# EAGLE board BrewTrollerWChipOnboard (EAGLE 5.00)
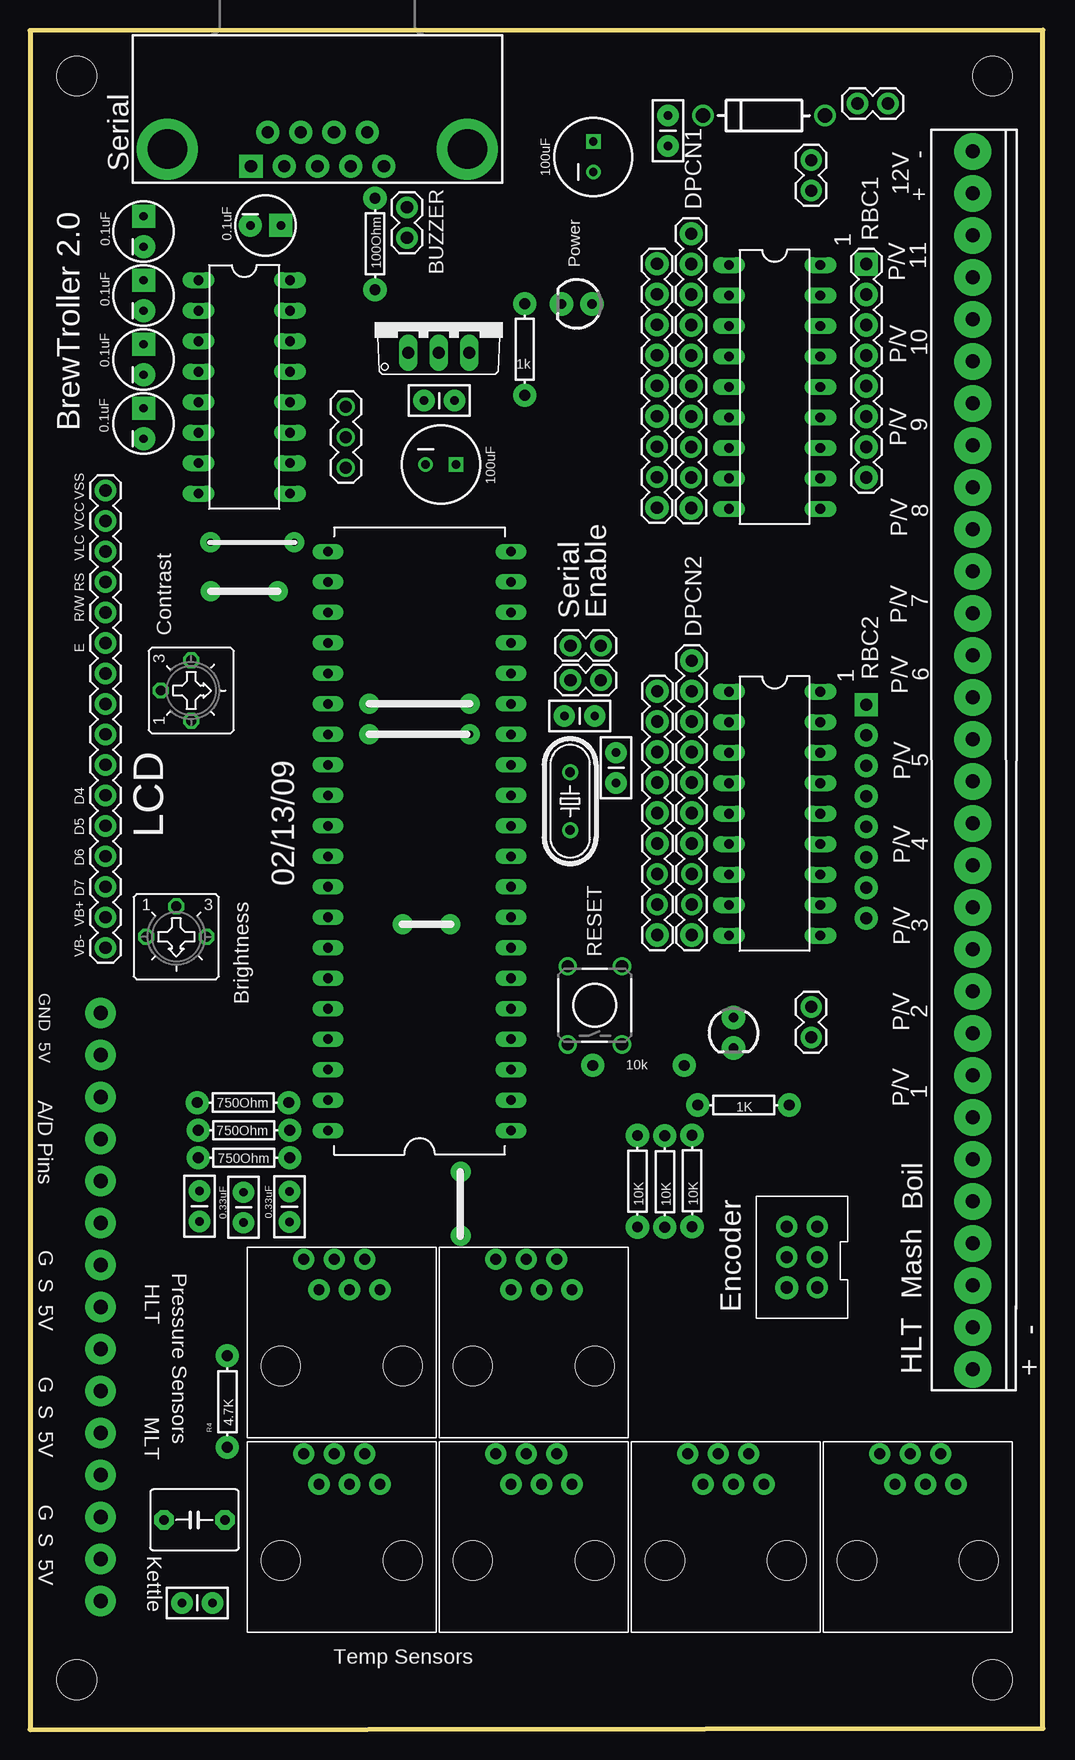
[diagram p0: board, top side]
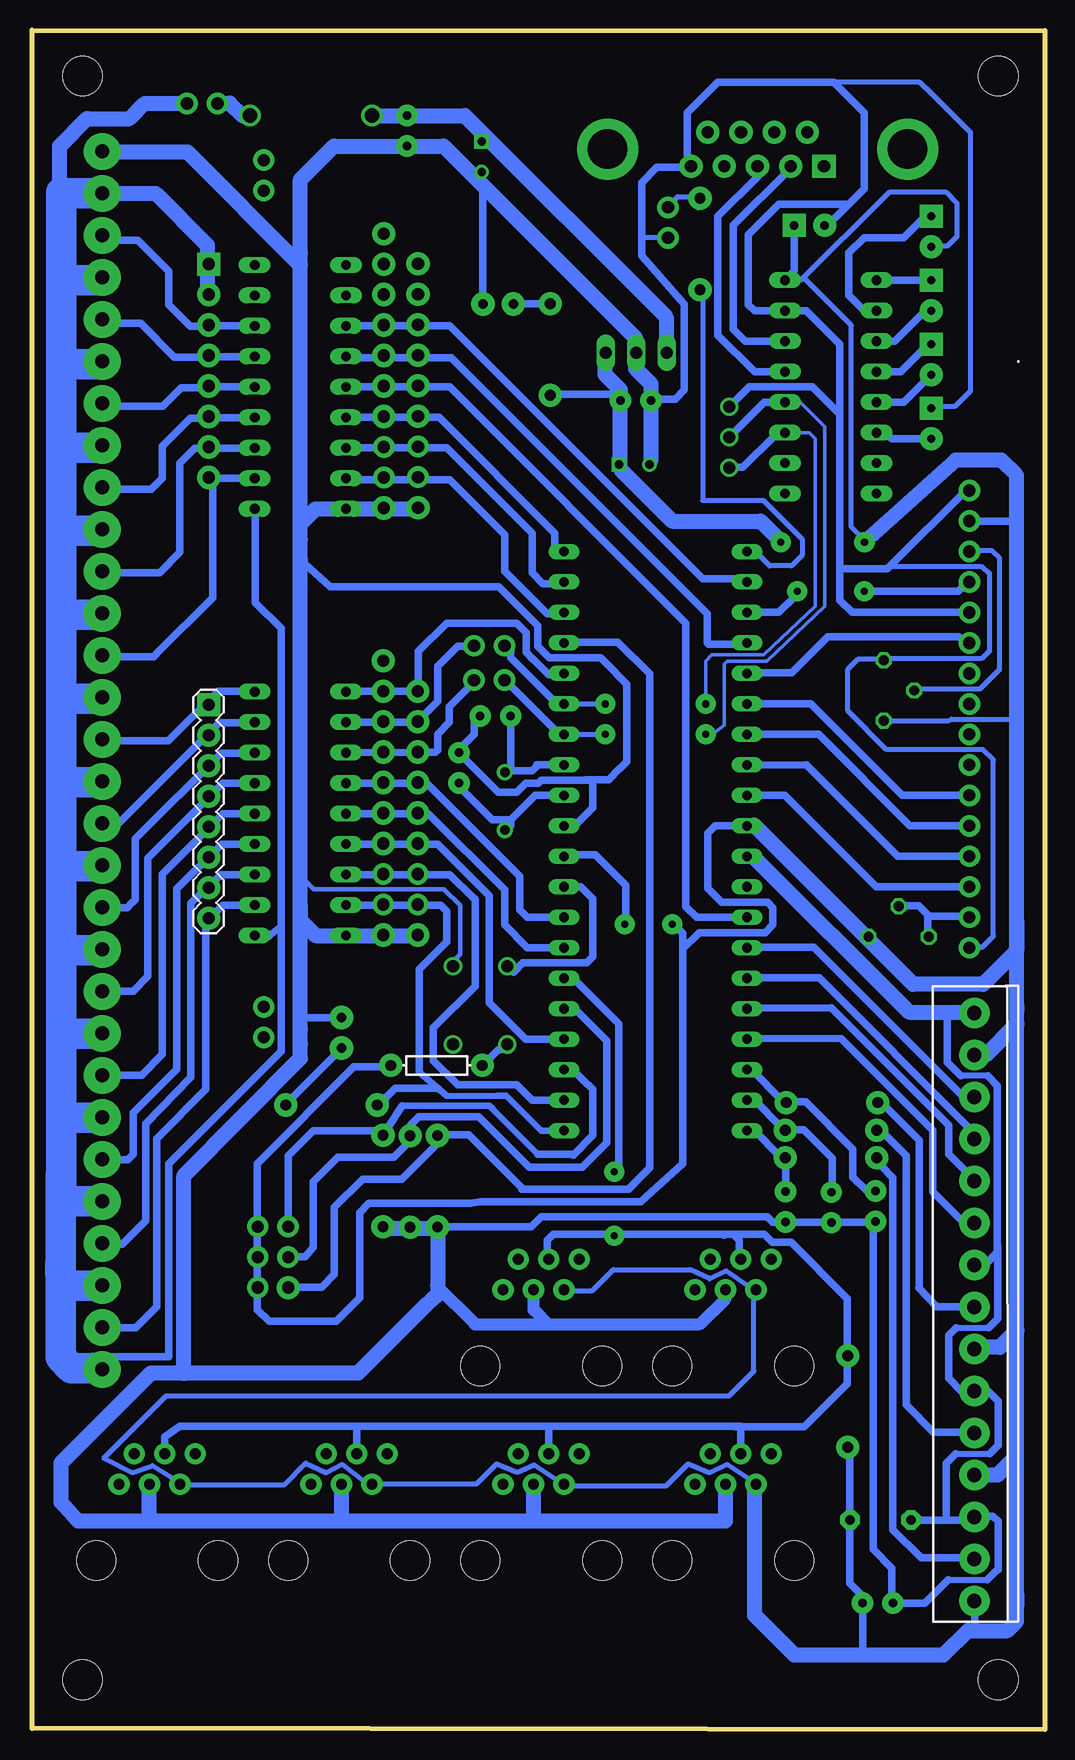
[diagram p1: board, bottom side, seen from below]

Size 84.4 x 141.63 mm. Coordinates in mm from the lower left corner, seen from the top.
Outline: 84.4,0.1 84.4,141.63 0,141.58 0,0 84.4,0.1
Copper layers (1*16): Top 0.035mm / dielectric 1.5mm / Bottom 0.035mm
Design rules "default *": minimum track width 10mil, minimum drill 24mil, track to track 8mil, track to pad 8mil, pad to pad 8mil, via to via 8mil, smd to smd 8mil, copper to edge 40mil, drill to drill 8mil, minimum pad ring 10mil, minimum via ring 8mil, stop-mask expansion 4mil, vias tented up to drill 0mil, thermal gap 10mil

## Footprints (pad centres in the part's own frame; a part is rotated, then mirrored left to right if it is on the bottom)
1X02 = drill 1.016 pad 1.778 round: 1 0,0; 2 2.54,0
LED3MM = drill 0.813 pad 1.93 round: A -1.27,0; K 1.27,0
HC49/S = drill 0.813 round: 1 -2.413,0; 2 2.413,0
DIL18 = drill 0.813 long: 1 -10.16,-3.81; 2 -7.62,-3.81; 3 -5.08,-3.81; 4 -2.54,-3.81; 5 0,-3.81; 6 2.54,-3.81; 7 5.08,-3.81; 8 7.62,-3.81; 9 10.16,-3.81; 10 10.16,3.81; 11 7.62,3.81; 12 5.08,3.81; 13 2.54,3.81; 14 0,3.81; 15 -2.54,3.81; 16 -5.08,3.81; 17 -7.62,3.81; 18 -10.16,3.81
DB9 = drill 1.016 pad 1.93 square: 1 -5.54,-1.42 | drill 1.016 pad 1.93 round: 2 -2.77,-1.42; 3 0,-1.42; 4 2.77,-1.42; 5 5.54,-1.42; 6 -4.15,1.42; 7 -1.38,1.42; 8 1.38,1.42; 9 4.15,1.42 | drill 3.302 pad 5.08 round: G1 -12.5,0; G2 12.5,0
SCREWTERMINAL3.5MM15P = drill 1.2 pad 2.54 round: 1 0.051,0.102; 2 3.551,0.102; 3 7.051,0.102; 4 10.551,0.102; 5 14.051,0.102; 6 17.551,0.102; 7 21.051,0.102; 8 24.551,0.102; 9 28.051,0.102; 10 31.551,0.102; 11 35.051,0.102; 12 38.551,0.102; 13 42.051,0.102; 14 45.551,0.102; 15 49.051,0.102
CAP-PTH-SMALL2 = drill 0.7 pad 1.778 round: 1 0,0; 2 2.54,0
2X3SHROUDEDHEADER = drill 1.02 pad 1.778 round: P$1 0,2.54; P$3 2.54,5.08; P$4 2.54,2.54; P$5 5.08,5.08; P$6 5.08,2.54 | drill 1.02 pad 1.93 round: P$2 0,5.08
C5B5 = drill 0.813 pad 1.6 octagon: 1 -2.54,0; 2 2.54,0
DIL40 = drill 0.8 long: 1 -24.13,-7.62; 2 -21.59,-7.62; 3 -19.05,-7.62; 4 -16.51,-7.62; 5 -13.97,-7.62; 6 -11.43,-7.62; 7 -8.89,-7.62; 8 -6.35,-7.62; 9 -3.81,-7.62; 10 -1.27,-7.62; 11 1.27,-7.62; 12 3.81,-7.62; 13 6.35,-7.62; 14 8.89,-7.62; 15 11.43,-7.62; 16 13.97,-7.62; 17 16.51,-7.62; 18 19.05,-7.62; 19 21.59,-7.62; 20 24.13,-7.62; 21 24.13,7.62; 22 21.59,7.62; 23 19.05,7.62; 24 16.51,7.62; 25 13.97,7.62; 26 11.43,7.62; 27 8.89,7.62; 28 6.35,7.62; 29 3.81,7.62; 30 1.27,7.62; 31 -1.27,7.62; 32 -3.81,7.62; 33 -6.35,7.62; 34 -8.89,7.62; 35 -11.43,7.62; 36 -13.97,7.62; 37 -16.51,7.62; 38 -19.05,7.62; 39 -21.59,7.62; 40 -24.13,7.62
CPOL-RADIAL-100UF-25V = drill 0.7 square: 1 1.27,0 | drill 0.7 round: 2 -1.27,0
TO220V = drill 1.016 long: 1 -2.54,-2.54; 2 0,-2.54; 3 2.54,-2.54
AXIAL-0.3 = drill 0.9 pad 1.93 round: P$1 -3.81,0; P$2 3.81,0
DIL16 = drill 0.813 long: 1 -8.89,-3.81; 2 -6.35,-3.81; 3 -3.81,-3.81; 4 -1.27,-3.81; 5 1.27,-3.81; 6 3.81,-3.81; 7 6.35,-3.81; 8 8.89,-3.81; 9 8.89,3.81; 10 6.35,3.81; 11 3.81,3.81; 12 1.27,3.81; 13 -1.27,3.81; 14 -3.81,3.81; 15 -6.35,3.81; 16 -8.89,3.81
CPOL-RADIAL-10UF-25V = drill 0.7 pad 1.93 square: 1 1.27,0 | drill 0.7 pad 1.93 round: 2 -1.27,0
RJ11VERTICAL = drill 0.9 pad 1.778 round: PIN1 1.905,8.89; PIN2 3.175,6.35; PIN3 4.445,8.89; PIN4 5.715,6.35; PIN5 6.985,8.89; PIN6 8.255,6.35 | hole 3.251: 0,0; 10.16,0
1X09 = drill 1.016 pad 1.93 round: 1 0,0; 4 7.62,0; 5 10.16,0; 6 12.7,0; 7 15.24,0; 8 17.78,0; 9 20.32,0 | drill 1.016 pad 1.778 round: 2 2.54,0; 3 5.08,0
1X08 = drill 1.016 pad 1.93 square: 1 0,0 | drill 1.016 pad 1.93 round: 2 2.54,0; 3 5.08,0; 4 7.62,0; 5 10.16,0; 6 12.7,0; 7 15.24,0; 8 17.78,0
1X16 = drill 1.016 pad 1.778 round: 1 0,0; 2 2.54,0; 3 5.08,0; 4 7.62,0; 5 10.16,0; 6 12.7,0; 7 15.24,0; 8 17.78,0; 9 20.32,0; 10 22.86,0; 11 25.4,0; 12 27.94,0; 13 30.48,0; 14 33.02,0; 15 35.56,0; 16 38.1,0
STAND-OFF = hole 3.302: 0,0
1X10 = drill 1.016 pad 1.93 round: 1 0,0; 4 7.62,0; 5 10.16,0; 6 12.7,0; 7 15.24,0; 8 17.78,0; 9 20.32,0; 10 22.86,0 | drill 1.016 pad 1.778 round: 2 2.54,0; 3 5.08,0
SCREWTERMINAL3.5MM30P = drill 1.2 pad 3.048 round: 1 0,0; 2 3.5,0; 3 7,0; 4 10.5,0; 5 14,0; 6 17.5,0; 7 21,0; 8 24.5,0; 9 28,0; 10 31.5,0; 11 35,0; 12 38.5,0; 13 42,0; 14 45.5,0; 15 49,0; 16 52.5,0; 17 56,0; 18 59.5,0; 19 63,0; 20 66.5,0; 21 66.5,0; 22 70,0; 23 73.5,0; 24 77,0; 25 80.5,0; 26 84,0; 27 87.5,0; 28 91,0; 29 94.5,0; 30 98,0; 31 101.5,0
CT6 = drill 0.813 octagon: A 2.515,0; E -2.515,0; S 0,-2.54
DIODE-1N4001 = drill 1.2 round: A -5.08,0; C 5.08,0
1X03 = drill 1.016 round: 1 0,0; 2 2.54,0; 3 5.08,0
TACTILE-PTH = drill 1.016 round: 1 -3.251,2.261; 2 3.251,2.261; 3 -3.251,-2.261; 4 3.251,-2.261

## Placement (x,y rotation side)
BUZZER  [1X02]  31.42,126.85 270 top
E$1  Debug  [LED3MM]  58.62,58.06 270 top
E$2  16Mhz  [HC49/S]  45.01,77.37 270 top
E$3  ULN2803  [DIL18]  62.05,76.33 270 top
E$4  [DB9]  23.95,131.7 0 top
E$5  [SCREWTERMINAL3.5MM15P]  5.79,10.67 90 bottom
E$6  ULN2803  [DIL18]  62.05,111.89 270 top
E$7  0.33uF  [CAP-PTH-SMALL2]  21.62,44.83 270 top
E$8  [2X3SHROUDEDHEADER]  68.15,36.83 90 top
E$9  .015uF  [C5B5]  13.7,17.47 180 top
E$10  ATMEGA644p  [DIL40]  32.46,74.04 90 top
E$11  100uF  [CPOL-RADIAL-100UF-25V]  46.94,131.06 90 top
E$12  100uF  [CPOL-RADIAL-100UF-25V]  34.24,105.41 0 top
E$13  100nF  [CAP-PTH-SMALL2]  53.16,134.49 270 top
E$14  100nF  [CAP-PTH-SMALL2]  35.38,110.74 180 top
E$15  22pF  [CAP-PTH-SMALL2]  47.07,84.46 180 top
E$16  22pF  [CAP-PTH-SMALL2]  48.84,78.87 90 top
E$17  7805  [TO220V]  34.06,117.27 0 top
E$18  [LED3MM]  45.57,118.8 180 top
E$19  1k  [AXIAL-0.3]  41.22,115.01 90 top
E$20  MAX202  [DIL16]  17.86,111.89 270 top
E$21  0.1uF  [CPOL-RADIAL-10UF-25V]  9.47,119.51 90 top
E$22  0.1uF  [CPOL-RADIAL-10UF-25V]  9.47,114.17 90 top
E$23  0.1uF  [CPOL-RADIAL-10UF-25V]  9.47,124.84 90 top
E$24  [RJ11VERTICAL]  68.91,14.1 0 top
E$25  [RJ11VERTICAL]  52.91,14.1 0 top
E$26  [RJ11VERTICAL]  36.91,14.1 0 top
E$27  [RJ11VERTICAL]  20.9,14.1 0 top
E$28  [RJ11VERTICAL]  20.9,30.3 0 top
E$29  [RJ11VERTICAL]  36.91,30.3 0 top
E$30  0.1uF  [CPOL-RADIAL-10UF-25V]  19.63,125.35 0 top
E$31  0.1uF  [CPOL-RADIAL-10UF-25V]  9.47,108.84 90 top
E$32  [1X09]  52.27,66.22 90 top
E$33  [1X02]  47.57,90.32 180 top
E$34  [1X08]  69.7,85.39 270 bottom
E$35  [1X08]  69.7,122.12 270 top
E$36  100Ohm  [AXIAL-0.3]  28.75,123.8 90 top
E$37  [1X09]  52.25,101.83 90 top
E$38  [1X16]  6.3,103.25 270 top
E$39  [1X02]  65.1,57.68 90 top
E$40  [STAND-OFF]  80.21,4.14 90 top
E$41  [STAND-OFF]  3.89,4.14 90 top
E$42  [STAND-OFF]  3.89,137.79 90 top
E$43  [STAND-OFF]  80.21,137.79 90 top
E$44  [1X10]  55.14,66.22 90 top
E$45  [1X10]  55.09,101.8 90 top
E$46  [1X02]  47.57,87.45 180 top
E$47  [1X02]  65.1,128.24 90 top
E$48  0.33uF  [CAP-PTH-SMALL2]  17.81,44.78 270 top
E$49  0.33uF  [CAP-PTH-SMALL2]  14.12,44.88 270 top
E$50  10k  [AXIAL-0.3]  50.7,55.35 180 bottom
E$51  0.01uF  [CAP-PTH-SMALL2]  12.67,10.56 0 top
E$52  [SCREWTERMINAL3.5MM30P]  78.56,30.02 90 top
E$53  100Ohm  [CT6]  12.19,66.07 180 top
E$54  10K  [CT6]  13.44,86.59 270 top
E$55  1K  [AXIAL-0.3]  59.46,52.04 180 top
E$56  750Ohm  [AXIAL-0.3]  17.75,52.25 180 top
E$57  750Ohm  [AXIAL-0.3]  17.83,49.94 0 top
E$58  750Ohm  [AXIAL-0.3]  17.83,47.65 180 top
E$59  Switch  [1X02]  71.5,135.51 180 top
E$60  [DIODE-1N4001]  61.16,134.49 180 top
E$61  TTLProg  [1X03]  26.31,105.16 90 top
R1  10K  [AXIAL-0.3]  50.62,45.69 90 top
R2  10K  [AXIAL-0.3]  52.91,45.67 90 top
R3  10K  [AXIAL-0.3]  55.17,45.72 90 top
R4  4.7K  [AXIAL-0.3]  16.45,27.33 90 top
RESET  Reset  [TACTILE-PTH]  47.07,60.35 90 top

## Library data of the parts
BUZZER E$1 E$3 E$4 E$6 E$7 E$10-E$23 E$30-E$51 E$55-E$61 R1-R4 RESET = SparkFun
E$2 = crystal
E$5 E$8 E$24-E$29 E$52 = Personal
E$9 = capacitor-wima
E$53 E$54 = pot

## Nets
S$22: E$3.5
S$65: E$10.13
S$67: E$26.PIN4
S$77: E$3.9 E$6.9
S$79: E$24.PIN4 E$25.PIN4 E$27.PIN4
S$80: E$25.PIN3
S$105: E$6.11
S$118: E$24.PIN3 E$27.PIN3

## Tracks (layer width: path | path; a pad name or v marks a point on that pad's centre or on a via)
S$1
  Bottom 1.27: 55.75,134.49 48.34,134.49 31.57,117.73 31.57,115.44
S$2
  Bottom 0.61: 62.81,52.6 62.79,52.6 59.08,56.31
S$3
  Bottom 0.61: 42.67,89.21 43.23,89.76 43.23,91.39 44.02,92.18 48.39,92.18
S$4
  Bottom 0.61: 40.54,87.91 41.35,87.91 42.72,89.28
S$5
  Bottom 0.61: 44.5,89.89 44.5,89.33 40.67,85.5
S$6
  Bottom 0.61: 44.53,79.86 44.53,83.95
S$7
  Bottom 0.61: 47.57,84.2 47.57,82.93 48.59,81.92 48.59,81.15 45.54,78.11 44.02,78.11 43.26,78.87 42.24,78.87 41.99,79.12 37.92,79.12 37.67,78.87 37.67,76.84 39.19,75.31
S$8
  Bottom 0.381: 49.15,64.21 48.74,64.62 48.74,68.68 50.09,70.03 60.93,70.03 61.72,70.82 61.72,71.12
S$9  (via drill 0.6 pad 1.68)
  other vias: 36.65,82.93
S$10
  Bottom 0.61: 57.68,71.25 49.61,71.25 47.57,69.22
S$11
  Bottom 0.61: 51.38,73.79 50.62,73.79 46.3,69.47 46.3,60.58 43.26,57.53 40.36,57.53
S$12
  Bottom 0.61: 39.19,70.23 38.68,70.23 37.67,69.22 37.67,64.39 38.18,63.88 43.51,63.88 44.27,63.12
S$13
  Bottom 0.559: 52.15,54.76 49.84,52.81
  Bottom 0.61: 58.37,68.71 50.37,68.71 49.86,68.2 49.86,65.66 52.15,63.37 52.15,54.76
S$14
  Bottom 2.54: 81.99,49.02 81.99,128.09
S$15
  Bottom 0.61: 23.95,129.41 27.25,126.11 27.25,116.21 24.21,113.16 22.28,113.16
S$16
  Bottom 0.61: 39.4,54.99 37.67,53.34 37.67,49.53 39.32,47.88
S$17
  Bottom 0.61: 52.22,101.8 52.27,101.75
S$18
  Bottom 0.61: 57.94,73.79 51.51,73.79
S$19
  Bottom 0.61: 59.13,59.31 62.03,59.31 62.1,59.39
S$20
  Bottom 0.61: 39.32,60.2 36.53,57.4 36.53,48.9 38.56,46.86
S$21
  Bottom 0.61: 34.24,45.47 34.67,45.03 43.49,45.03 | 43.49,45.03 43.61,45.03 | 48.08,49.56 48.01,49.56 43.49,45.03
S$22
  Bottom 0.61: 40.72,65.15 43.13,65.15 45.03,67.06 45.03,69.98 51.38,76.33 E$3.5
S$23
  Bottom 0.61: 39.32,62.61 35.51,58.8 35.51,46.61
S$24
  Bottom 0.61: 21.62,120.83 20.88,121.56 20.88,125.04
S$25
  Bottom 0.61: 14.15,120.78 9.98,120.78
S$26
  Bottom 0.635: 65.8,101.79 65.8,93.92 63.64,91.76 63.64,66.93 64.66,66.17
S$27
  Bottom 2.54: 81.99,45.53 81.99,48.96
S$28
  Bottom 2.54: 81.17,50.99 78.56,50.99
S$29
  Bottom 2.54: 81.23,57.98 78.56,57.98
S$30
  Bottom 2.54: 81.29,64.96 78.56,64.96
S$31
  Bottom 2.54: 81.23,78.93 78.56,78.93
S$32
  Bottom 2.54: 81.61,85.92 78.56,85.92
S$33
  Bottom 2.54: 81.23,92.9 78.56,92.9
S$34
  Bottom 2.54: 81.29,99.89 78.56,99.89
S$35
  Bottom 2.54: 81.36,106.81 78.56,106.81
S$36
  Bottom 2.54: 81.23,113.79 78.56,113.79
S$37
  Bottom 2.54: 81.04,120.78 78.56,120.78
S$38  (via drill 0.6 pad 1.68)
  other vias: 35.89,46.48
S$39
  Bottom 2.54: 81.55,71.95 78.56,71.95
S$40
  Bottom 0.61: 63.63,67.39 63.63,56.52 73,47.14 73,31.06 79.38,31.06 79.4,31.09
S$41
  Bottom 0.61: 77.85,33.48 75.77,33.48 74.02,35.23 74.02,49.25 69.93,53.34 69.93,67.31 68.53,68.71 66.8,68.71 66.75,68.76
S$42
  Bottom 0.61: 77.88,40.46 76.89,40.46 74.96,42.39 74.96,50.47 71.2,54.36 71.2,68.86 68.68,71.25 66.8,71.25
S$43
  Bottom 0.61: 77.83,47.5 76.45,47.5 76,47.96 76,51.38 72.34,55.04 72.34,70.05 68.61,73.79 66.78,73.79 66.75,73.81
S$44
  Bottom 0.61: 66.78,76.28 66.7,76.35
S$45
  Bottom 0.61: 77.75,54.53 75.29,54.53 73.56,56.26 73.56,71.27 68.5,76.33 66.83,76.33 66.8,76.3
S$46
  Bottom 0.61: 77.83,61.52 76,61.52 74.75,62.76 74.75,72.62 68.55,78.82
S$47
  Bottom 0.61: 68.5,78.84 66.73,78.84
S$48
  Bottom 0.61: 66.8,104.27 66.83,104.29
S$49
  Bottom 0.61: 66.85,111.86 66.83,111.89
S$50
  Bottom 0.61: 78.54,110.29 73.53,110.29 71.98,111.84 69.27,111.84
S$51
  Bottom 0.61: 66.73,116.92 66.83,117.02
S$52
  Bottom 0.406: 6.3,103.28 6.35,103.23
S$53  (via drill 0.6 pad 1.68)
  other vias: 35.89,41.15
S$54
  Bottom 0.61: 40.84,67.69 43.13,67.69 43.76,68.33 43.76,71.12 51.51,78.87 58.5,78.87
S$55
  Bottom 0.61: 9.98,118.24 12.52,115.7 13.64,115.7
S$56
  Bottom 0.61: 9.98,115.19 12.01,113.16 13.61,113.16
S$57
  Bottom 0.61: 77.78,68.5 76.48,68.5 76.05,68.94 76.02,68.94 75.79,69.16 75.79,74.22 68.66,81.36 66.5,81.36
S$58
  Bottom 0.61: 40.21,77.85 42.49,77.85 44.53,75.82 | 44.53,75.82 44.53,75.31 | 44.53,75.82 46.05,75.82 48.59,78.36
S$59
  Bottom 0.61: 9.73,112.65 11.76,110.62 13.54,110.62
S$60
  Bottom 0.61: 13.28,108.08 12.78,107.57 9.73,107.57
S$61
  Bottom 0.61: 9.98,126.11 11.76,124.33 15.06,124.33 16.33,123.06 16.33,119.51 15.09,118.26 | 15.06,118.24 15.09,118.26 | 15.09,118.26 14.1,118.26
S$62
  Bottom 0.61: 21.41,129.92 25.98,125.35 25.98,116.71 24.97,115.7 22.43,115.7
S$63
  Bottom 1.27: 6.81,59.79 11.33,59.79 24.33,72.8
S$64
  Bottom 0.61: 39.57,90.63 35.59,90.63 32.94,87.99 32.94,46.81 34.7,45.06
S$65
  Bottom 0.61: 42.24,80.39 42.37,80.39 | 42.24,80.39 E$10.13 | 44.4,79.88 42.75,79.88 42.24,80.39
S$66
  Bottom 1.27: 36.65,114.17 36.65,112.9 35.38,111.63 35.38,105.03 31.06,100.71 23.7,100.71 22.02,99.03
S$67
  Bottom 1.27: 42.62,17.65 E$26.PIN4
S$68
  Bottom 0.61: 44.5,86.97 40.46,82.93
S$69
  Bottom 0.61: 40.97,92.96 41.48,92.96 45.03,96.52 45.03,99.57 49.61,104.14 58.24,104.14 58.37,104.27 58.37,104.14
S$70
  Bottom 0.61: 40.84,95.5 41.86,95.5 42.75,96.39 42.75,99.7 49.86,106.81 58.37,106.81
S$71
  Bottom 0.61: 40.84,98.04 40.84,99.7 50.5,109.35 57.99,109.35
S$72
  Bottom 0.61: 39.27,75.29 40.01,75.29
S$73
  Bottom 0.61: 25.73,67.69 29.03,67.69 29.92,68.58 29.92,92.2 49.61,111.89 58.37,111.89
S$74
  Bottom 0.61: 25.6,90.42 28.02,90.42 28.14,90.55 28.14,92.96 49.48,114.3 57.86,114.3
S$75  (via drill 0.6 pad 1.68)
  other vias: 36.65,85.47
S$76
  Bottom 0.61: 22.43,118.24 24.21,118.24 24.71,118.75 24.71,124.59 22.17,127.13 16.33,127.13 | 29.54,130.94 29.79,131.19 29.79,134.75 27.25,137.29 17.6,137.29 15.06,134.75 15.06,128.4 16.33,127.13 | 16.33,127.13 18.11,125.35
S$77
  Bottom 0.406: 62.05,99.19 62.05,100.46
  Bottom 0.61: 30.3,130.18 32.33,130.18 33.6,128.91 33.6,126.37 | 33.6,126.37 33.6,126.62 | 38.25,79.15 36.37,79.15 35.46,80.06 35.43,80.06 34.85,80.65 34.85,87.12 36.65,88.93 36.65,88.95 37.01,89.31 41.3,89.31 42.27,90.27 42.27,92 45.52,95.25 59.56,95.25 62.05,97.49 | 33.6,126.37 33.6,122.81 30.05,118.8 30.05,111.63 30.81,110.87 32.84,110.87
  Bottom 1.27: 32.84,105.79 32.84,110.87 32.84,112.14 34.11,113.41 34.11,115.95 50.11,131.95 59.26,131.95 62.05,129.16 62.05,122.05 | 52.27,101.85 52.27,101.73 E$6.9 60.78,101.73 62.05,100.46 | 62.05,122.05 62.05,123.06 | 58.62,66.17 E$3.9 | 58.62,66.17 52.27,66.17 | 58.62,66.17 60.78,66.17 62.05,67.44 62.05,68.58 | 62.05,122.05 62.05,99.19 62.05,97.49 62.05,68.58 | 62.05,57.15 62.05,68.58 | 62.05,122.05 71.45,131.45 77.55,131.45
S$78  (via drill 0.6 pad 1.68)
  other vias: 28.27,82.93
S$79
  Bottom 1.27: E$27.PIN4 26.62,17.4 58.62,17.4 | 58.62,17.4 E$25.PIN4 | E$24.PIN4 74.63,17.78 74.24,17.4 58.62,17.4
S$80
  Bottom 0.635: E$25.PIN3 57.35,25.15
S$81  (via drill 0.6 pad 1.68)
  other vias: 28.27,85.47
S$82
  Bottom 0.406: 39.45,82.93 37.16,82.93
S$83
  Bottom 0.61: 25.6,95.89 28.52,95.89 49.61,116.97 58.62,116.97
S$84
  Bottom 0.305: 28.27,85.47 28.27,89.03 27.76,89.56 23.44,89.56 19.13,93.62 19.13,107.57 19.63,108.08 20.9,108.08
S$85
  Bottom 0.305: 27.76,82.91 26.75,83.69 26.75,88.77 26.49,89.03 23.19,89.03 18.36,93.6 18.36,108.59 20.4,110.62 20.9,110.62
S$86
  Bottom 0.406: 39.62,85.47 37.16,85.47
S$87
  Bottom 0.406: 61.85,87.88 61.87,87.86
S$88  (via drill 0.6 pad 1.68)
  other vias: 20.65,94.87
S$89  (via drill 0.6 pad 1.68)
  Bottom 0.61: v15.06,94.87 7.21,94.87 6.88,95.2
S$90
  Bottom 0.61: 24.21,93.09 22.17,93.09 20.9,94.36
S$91
  Bottom 0.61: 16.28,18.03 16.28,22.63 16.38,22.73
S$92
  Bottom 0.61: 57.79,83.95 51.99,83.95
S$93
  Bottom 0.406: 24.69,20.9 26.49,22.1 27.94,21.41 29.74,22.15 31.57,20.32 39.4,20.32
S$94
  Bottom 0.61: 24.03,88.09 21.11,88.09 18.11,91.08 7.19,91.08 6.99,90.88
S$95
  Bottom 0.61: 20.9,118.24 19.89,118.24 17.09,115.44 17.09,94.11 16.08,93.09 6.93,93.09
S$96
  Bottom 0.61: 54.97,52.4 54.97,52.63 54.15,53.44 50.6,53.44 50.55,53.39
S$97
  Bottom 0.61: 25.86,25.25 20.07,25.25 16.48,28.83 16.48,30.38
S$98
  Bottom 0.61: 23.95,82.93 18.87,82.93 11.25,75.31 6.93,75.31
S$99
  Bottom 0.61: 24.46,80.37 19.89,80.39 12.27,72.77 6.93,72.77
S$100
  Bottom 1.27: 78.59,128.04 78.56,127.76
  Bottom 2.54: 81.97,128.04 78.59,128.04
S$101
  Bottom 0.61: 24.38,77.88 21.67,77.85 14.05,70.23 6.93,70.23
S$102  (via drill 0.6 pad 1.68)
  other vias: 22.02,98.93
S$103  (via drill 0.6 pad 1.68)
  other vias: 15.04,98.93
S$104
  Bottom 0.406: 70.56,29.72 70.82,29.72
  Bottom 1.27: 51.38,35.56 57.23,29.72 70.56,29.72 74.5,29.72 81.99,22.23 81.99,18.92 80.59,17.4 73.86,17.4
S$105
  Bottom 0.61: E$6.11 69.34,104.27 69.37,104.29 69.37,94.34 74.07,89.64 74.07,89.61 74.27,89.41 78.56,89.41
S$106
  Bottom 0.61: 57.84,81.43 51.89,81.41
S$107
  Bottom 2.54: 82.02,46.18 82.02,31.01 81.13,30.12 78.61,30.12
S$108
  Bottom 2.54: 78.66,36.98 78.74,37.06
S$109
  Bottom 2.54: 82.04,38.02 82.04,38.81
S$110
  Bottom 0.406: 78.63,44.01 78.5,44.13
  Bottom 2.54: 80.53,44.01 78.63,44.01
S$111
  Bottom 2.54: 81.94,36.98 78.56,36.98
S$112
  Bottom 1.27: 71.76,29.69 71.76,46.15 62.05,55.93 62.05,58.37
S$113
  Bottom 0.61: 77.75,75.46 77.27,75.46 68.81,83.92 66.68,83.92
S$114
  Bottom 0.61: 77.83,82.4 73.05,82.4 68.91,86.54 66.75,86.54 66.7,86.49
S$115
  Bottom 0.61: 78.54,96.39 73.79,96.39 72.09,98.1 72.09,105.54 70.87,106.76 69.42,106.76 69.39,106.78
S$116
  Bottom 0.61: 52.12,81.43 50.8,81.43 50.62,81.61 50.62,82.96 49.63,83.95 49.63,85.24 48.06,86.82
S$117
  Bottom 1.27: 24.23,75.36 11,62.1 5.16,62.1 2.36,64.9 2.36,67.44 | 15.09,98.91 7.44,105.79 3.63,105.79 2.36,104.52 2.36,67.44 | 2.36,60.07 2.36,67.44 | 2.36,60.07 2.36,59.82 | 2.36,11.3 2.36,60.07 | 2.36,11.3 2.36,10.29 | 2.36,11.3 2.36,9.02 3.12,8.26 6.43,8.26 8.46,6.22 20.9,6.22 24.21,9.53 24.21,20.45
S$118
  Bottom 0.406: 41.22,25.27 41.35,25.27
  Bottom 0.635: E$27.PIN3 25.35,25.27 41.22,25.27 72.09,25.27 73.36,24.38 E$24.PIN3 | 41.35,25.27 41.35,23.77
S$119
  Bottom 0.61: 25.04,75.31 27.48,75.31 28.09,74.7 28.09,70.1 26.92,68.94 23.11,68.94 22.68,68.5 22.68,67.06 23.32,66.42 28.83,66.42 30.2,65.05 30.2,64.31 | 30.2,64.31 30.2,47.14 33.71,43.97 47.04,43.97 47.85,43.84 56.34,43.84 57.1,43.08 57.1,35.99 59.08,34.01 64.64,34.01 65.63,35 65.63,42.42 | 30.2,64.31 30.2,66.37 30.63,66.8
S$120
  Bottom 0.61: 41.48,39.75 41.48,40.77 40.97,41.28 25.98,41.28 25.48,40.77 25.48,39.75
S$121
  Bottom 0.61: 63.07,42.6 63.07,47.8 60.96,49.91 55.91,49.91 55.85,49.86
S$122
  Bottom 0.61: 62.46,39.4 61.65,39.4 60.96,40.18 60.96,45.64 58.93,47.68 54.25,47.68 52.96,48.97
S$123
  Bottom 0.61: 62.31,36.86 60.27,36.86 59.21,37.92 59.21,43.54 56.87,45.87 53.62,45.87 50.62,48.87
S$124
  Bottom 0.559: 46.03,51.71 46.3,51.99 53.54,51.99
  Bottom 0.61: 54.76,50.17 53.54,51.99
S$125
  Bottom 0.61: 38.61,46.86 42.98,46.86 47.19,51.08 52.2,51.08 52.86,50.42
S$126
  Bottom 0.61: 49.96,49.56 48.16,49.56
S$127
  Bottom 1.27: 50.62,41.78 55.19,41.78 55.25,41.83
S$128
  Bottom 1.27: 51.26,35.69 51.23,35.69 50.88,36.04 50.85,36.04 50.57,36.32 50.57,41.55 50.67,41.66
S$129  (via drill 0.6 pad 1.68)
  other vias: 31.06,67.11
S$130  (via drill 0.6 pad 1.68)
  other vias: 35.03,67.11
S$131
  Bottom 0.61: 39.75,72.9 37.47,72.9 34.93,70.36 34.93,67.62 35.05,67.49
S$132
  Bottom 0.61: 57.73,86.54 52.4,86.54
S$133
  Bottom 0.61: 21.62,45.34 21.62,46.91
S$134
  Bottom 0.406: 50.42,25.25 50.5,25.17
S$135
  Bottom 0.61: 6.78,52.68 19.28,65.18 24,65.18
S$136
  Bottom 0.61: 22.17,52.71 24.21,54.74
S$137
  Bottom 0.61: 22.17,50.42 23.95,52.2
S$138
  Bottom 0.61: 6.3,50.11 18.82,62.64 23.93,62.64
S$139
  Bottom 0.61: 66.7,114.38 66.75,114.43
S$140
  Bottom 0.61: 69.34,114.38 72.54,114.38 75.36,117.2 78.54,117.2 78.61,117.27
S$141
  Bottom 0.61: 78.56,103.38 74.47,103.38 73.56,104.29 73.56,106.96 71.25,109.27 69.32,109.27
S$142
  Bottom 0.61: 69.29,116.94 71.22,116.94 73.03,118.75 73.03,121.51 75.62,124.1 78.41,124.1 78.51,124.21
S$143
  Bottom 0.61: 69.34,106.78 65.86,106.78 65.79,106.86
S$144
  Bottom 0.61: 69.34,109.32 65.86,109.32
S$145
  Bottom 0.61: 69.29,111.89 65.91,111.89 65.84,111.96
S$146
  Bottom 0.61: 69.29,114.4 65.96,114.4 65.79,114.22 65.79,114.27
S$147
  Bottom 0.61: 69.39,116.97 65.86,116.97 65.84,116.94
S$148
  Bottom 0.61: 6.6,46.53 8.03,47.96 8.03,50.37 17.81,60.15 24.38,60.12
S$149
  Bottom 0.61: 6.78,42.24 9.37,44.83 9.37,49.96 16.97,57.56 24.41,57.61
S$150
  Bottom 0.61: 22.17,47.88 24.21,49.91
S$151
  Bottom 0.61: 14.81,42.29 22.68,42.29 23.14,42.75 28.19,42.75 | 50.5,41.91 42.82,41.91 41.99,42.75 28.19,42.75 | 28.19,42.75 27.66,42.75
S$152
  Bottom 0.61: 17.73,45.36 17.73,47.6 20.12,49.99 20.93,49.99
S$153
  Bottom 0.61: 14.73,44.93 14.91,44.93 16,46.03 16,48.36 19.94,52.3 20.98,52.3
S$154
  Bottom 1.27: 4.98,56.16 2.34,58.8 2.34,60.25
S$155
  Bottom 0.508: 4.78,54.48 7.01,54.48
  Bottom 0.61: 8.13,59.69 8.13,55.6 7.01,54.48 | 4.78,54.48 3.96,53.67 3.96,42.11 | 3.96,42.11 3.96,41.35 | 5.03,38.71 3.96,39.78 3.96,42.11
S$156
  Bottom 0.61: 5.87,9.86 5.87,8.28
S$157
  Bottom 0.61: 13.89,46.96 13.64,46.96 12.67,46 12.67,16.66 10.31,14.3 6.76,14.3 6.73,14.33
S$158
  Bottom 0.61: 6.86,24.79 9.3,24.79 11.56,27.05 11.56,47.8 13.28,49.53
S$159
  Bottom 0.61: 6.73,35.23 9.02,35.23 10.52,36.8
S$160
  Bottom 0.61: 13.18,51.82 10.49,49.12 10.49,36.8
S$161
  Bottom 0.61: 7.01,17.5 7.06,17.45 10.47,17.45
S$162
  Bottom 0.61: 15.16,6.5 15.19,6.53 15.19,11.1 16.28,12.19 16.28,16.79
S$163
  Bottom 0.508: 8.08,12.47 4.83,12.47
  Bottom 0.61: 4.83,12.47 3.96,13.34 | 8.08,12.47 10.03,10.52 12.12,10.52
S$164
  Bottom 1.27: 4.98,21.21 3.96,21.21 2.51,22.66
S$165
  Bottom 1.27: 5.05,31.85 3.76,31.85 2.34,33.27
S$166
  Bottom 0.508: 7.39,33.5 4.67,33.5 | 7.42,22.99 4.6,22.99
  Bottom 0.61: 3.94,40.34 3.94,34.24 4.67,33.5 | 7.39,33.5 8.03,32.87 8.03,29.26 6.96,28.19 4.72,28.19 3.89,27.36 3.89,23.7 4.6,22.99 | 7.42,22.99 8.23,22.17 8.23,17.48
S$167
  Bottom 0.61: 4.98,17.78 4.34,17.78 3.91,17.35 3.91,13.31
S$168
  Bottom 0.61: 12.75,10.41 12.75,13.46 14.33,15.04 14.33,41.76 14.4,41.83
S$169
  Bottom 0.406: 24.26,35.79 24.26,29.87 26.31,27.81 73.23,27.81 78.44,22.61 76.07,21.41 74.37,22 72.67,20.96
S$170
  Bottom 0.406: 40.64,20.78 42.57,22.05 43.97,21.46 45.69,22.15 47.35,20.5 55.4,20.5
S$171
  Bottom 0.406: 56.64,20.63 58.57,22.1 59.89,21.41 61.6,22.2 63.37,20.42 71.45,20.42
S$172
  Bottom 0.406: 24.66,36.91 26.54,38.23 27.94,37.57 29.57,38.3
S$173
  Bottom 1.016: 26.62,35.92 28.75,33.78 41.43,33.78 42.62,34.98 42.62,35.97
S$174
  Bottom 1.016: 50.75,37.01 47.5,33.76 41.25,33.76
S$175
  Bottom 0.406: 39.42,36.58 37.72,36.58 35.97,38.33 29.62,38.33
S$176
  Bottom 0.61: 44.02,53.72 42.75,52.45 40.21,52.45
S$177
  Bottom 0.61: 52.25,86.54 52.25,89.84 49.86,92.18 48.11,92.18
S$178
  Bottom 0.508: 49.78,52.81 45.62,52.81 45.24,52.81
  Bottom 0.533: 45.62,52.81 44.88,52.81 41.99,49.91 40.28,49.91
S$179
  Bottom 0.61: 47.57,69.27 47.5,69.19 47.5,61.95 50.98,58.47 50.98,55.75 48.95,53.72 44.09,53.72
S$180
  Bottom 0.61: 46.3,55.91 45.54,56.67 45.42,56.67
S$181
  Bottom 0.61: 65.66,41.99 65.66,47.17 57.61,55.22 55.35,55.22 55.27,55.3
S$182
  Bottom 0.61: 6.35,100.71 2.57,100.71 2.39,100.53
S$183
  Bottom 1.27: 69.01,135.51 68.99,135.53 67.92,135.53 66.85,134.47 66.19,134.47
S$184
  Bottom 0.61: 16.46,31.8 16.46,35.89 21.16,40.59 22.71,40.59 23.39,41.28 26.67,41.28 26.75,41.2
S$185
  Bottom 0.61: 7.01,67.77 9.63,67.77 10.52,68.66 11.89,68.66
S$186
  Bottom 0.61: 9.78,66.6 9.78,67.77 9.73,67.82
S$187
  Bottom 0.406: 5.66,65.18 5.23,65.18 4.29,66.12 4.29,80.8 5.18,81.66 13.21,81.66 16.43,84.91 16.43,88.34 15.55,89.23 13.59,89.23 13.46,89.1
S$188
  Bottom 0.406: 5.66,98.25 4.42,98.25 3.78,97.61 3.78,88.34 5.39,86.74 10.39,86.74
S$189
  Bottom 0.406: 4.62,89.89 4.62,89.87 | 4.62,89.89 4.62,96.27 | 4.62,96.27 4.62,96.39 | 4.62,89.89 5.23,89.28 13.11,89.28 | 4.62,96.27 5.26,96.9 12.98,96.9
  Bottom 0.61: 17.07,96.72 13.16,96.72 12.98,96.9 6.55,103.28
S$190
  Bottom 0.61: 40.67,111.28 35.74,111.28 35.69,111.23
S$191
  Bottom 0.61: 43.84,118.82 41.66,118.82 41.63,118.8
S$192
  Bottom 0.61: 46.84,119.23 46.84,128.58 46.81,128.6
S$193
  Bottom 0.406: 28.52,119.33 28.52,102.44 23.47,102.44 20.24,99.21 20.24,97.84 21.11,96.98 22.94,96.98 24.08,98.12
S$194
  Bottom 0.406: 32.74,105.94 32.54,105.74
S$195
  Bottom 0.406: 31.52,124.31 31.52,124.33 33.68,124.33
S$196
  Bottom 0.533: 61.85,61.32 61.9,61.37
S$197
  Bottom 0.559: 42.27,47.93 46.03,51.69
  Bottom 0.61: 42.27,47.93 39.32,47.93
S$198
  Bottom 0.61: 51.89,84.1 51.89,84.4 50.62,85.67 50.62,88.62 48.95,90.3 48.41,90.3 48.34,90.22
S$199
  Bottom 1.27: 82.12,127.89 82.12,131.95 79.83,134.24 76.28,134.24 75.01,135.51 72.21,135.51
S$200
  Bottom 0.406: 21.44,120.85 19.96,120.85 16.13,117.02 16.13,100.2 14.94,99.01
S$201
  Bottom 0.406: 9.53,110.29 7.47,110.29 6.2,111.56 6.2,133.07 9.91,136.78 9.93,136.78 10.44,137.29 18.54,137.29 18.64,137.19
S$202
  Bottom 0.406: 21.64,120.8 20.29,120.8 13.28,127.81 13.26,127.81 12.93,128.14 8.28,128.14 7.34,127.2 7.34,124.41 8.13,123.62 9.53,123.62 9.55,123.6 9.55,123.57
S$203
  Bottom 0.406: 13.41,84.07 8,84.07 7.8,84.2 2.46,84.2 2.44,84.25
S$204
  Bottom 0.61: 9.35,77.85 9.47,77.85 | 9.35,77.85 6.93,77.85 | 23.95,85.47 19.51,85.47 11.89,77.85 9.35,77.85
S$205
  Bottom 0.61: 46.91,128.98 46.91,130
S$206
  Bottom 1.27: 69.8,119.63 69.8,123.7 74.12,128.02 77.67,128.02
S$207
  Bottom 0.762: 64.69,66.19 64.72,66.22 65.76,66.22
S$208
  Bottom 0.61: 39.27,70.23 39.88,70.23
S$209
  Bottom 0.406: 12.95,89.31 12.98,89.28
S$210
  Bottom 0.406: 28.93,126.8 28.93,126.82
S$211
  Bottom 0.406: 31.01,127.33 30.61,127.74 29.49,127.74
S$212
  Bottom 0.61: 17.12,108.84 17.12,109.63 19.41,111.91 24.64,111.91 25.86,110.69
S$213
  Bottom 0.61: 25.83,105.18 25.17,105.18 22.53,107.82
S$214
  Bottom 0.61: 22.53,110.59 23.39,110.59 25.81,108.18

## Text on the board
tPlace: 11 | P/V | P/V | 10 | 9 | P/V | VSS | 8 | VCC | P/V | VLC | RS | 7 | R/W | P/V | Contrast | E | 6 | P/V | 5 | P/V | D4 | D5 | LCD | 4 | D6 | P/V | D7 | VB+ | 3 | P/V | VB- | Brightness | 2 | P/V | P/V | 1 | Boil | Mash | HLT
tNames: Serial | - | 12V | DPCN1 | + | Power | RBC1 | 1 | BrewTroller 2.0 | Serial | Enable | DPCN2 | 1 | RBC2 | 02/13/09 | GND | 5V | A/D Pins | G S 5V | Pressure Sensors | HLT | Encoder | - | G S 5V | + | MLT | G S 5V | Kettle | Temp Sensors